# Altium PCB Motor Controller.PcbDoc (part 1 of 2)
Units mm, origin at the board's own origin, x right, y up, seen from the top; angles counter-clockwise.
Board outline 150 x 105 mm, 4 copper layers (Top Layer, Layer 1, Layer 2, Bottom Layer), stack 1.64 mm thick; 87 components, 29 nets, 264 pads, 470 vias.
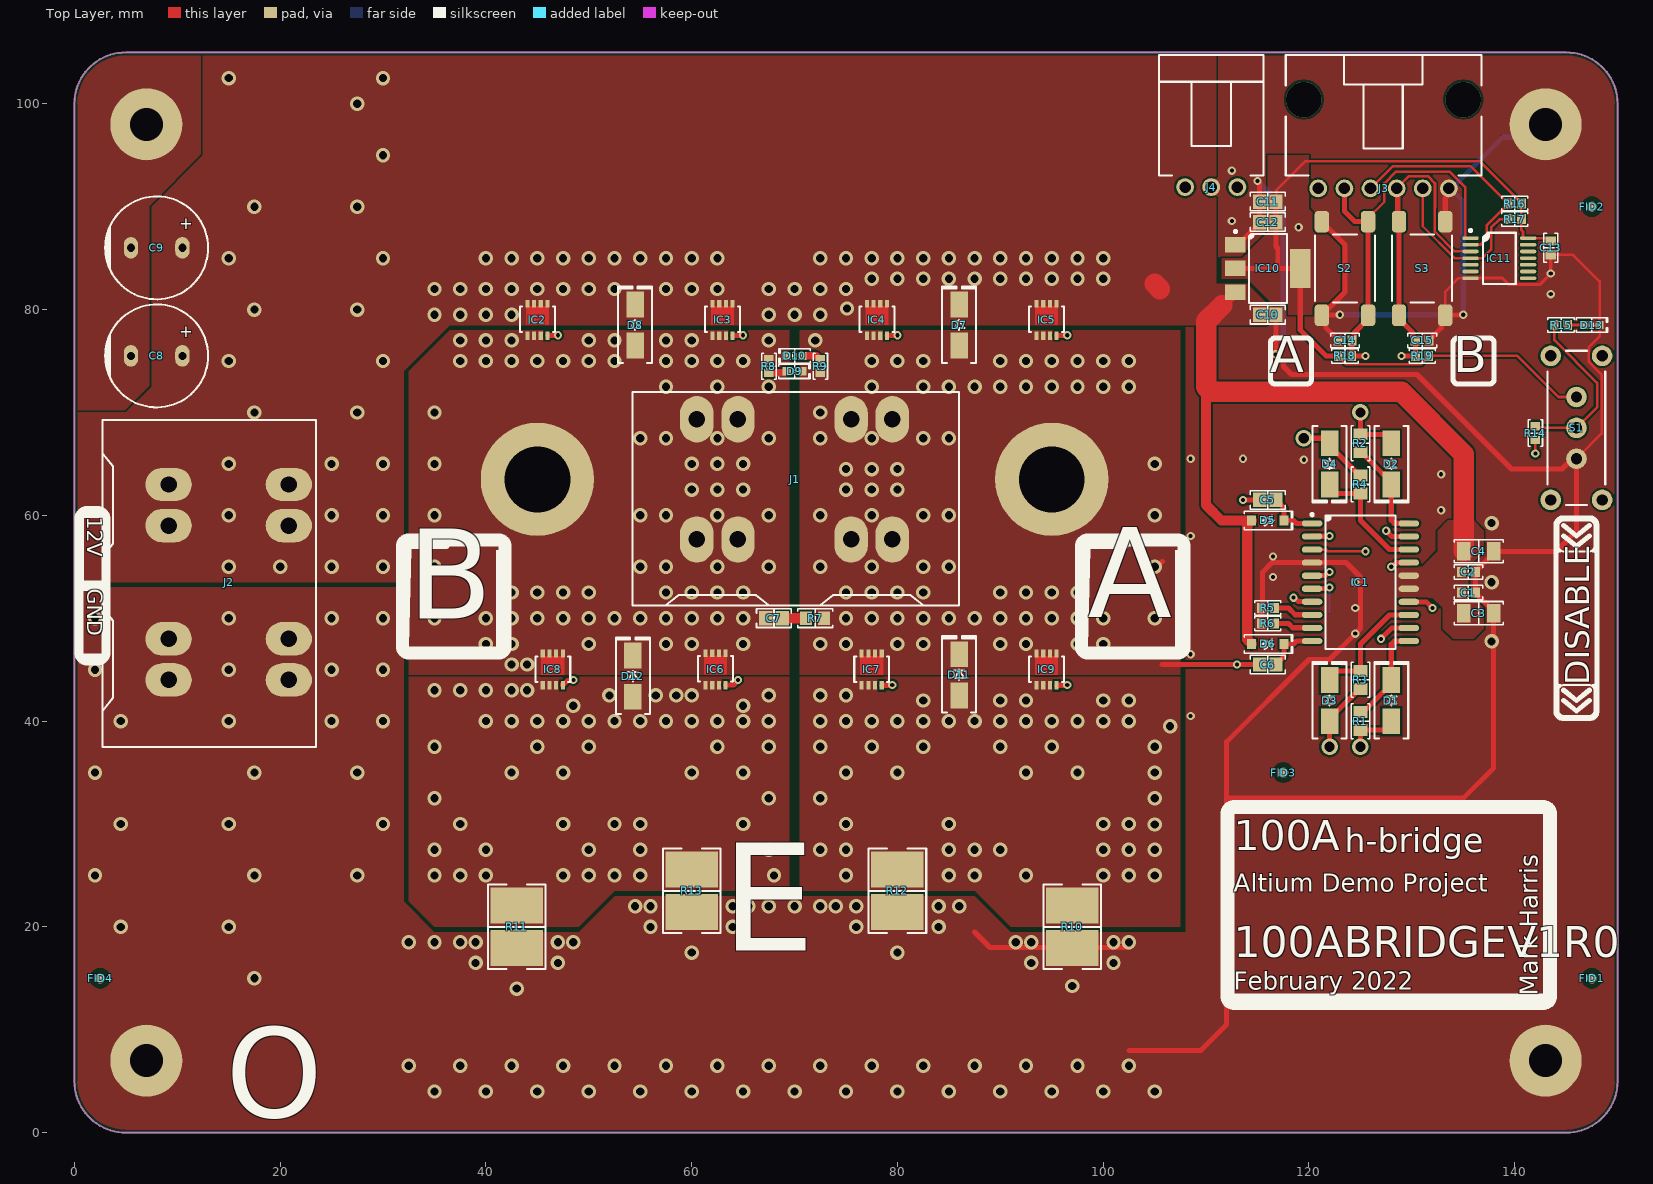
[diagram p0: Top Layer view]
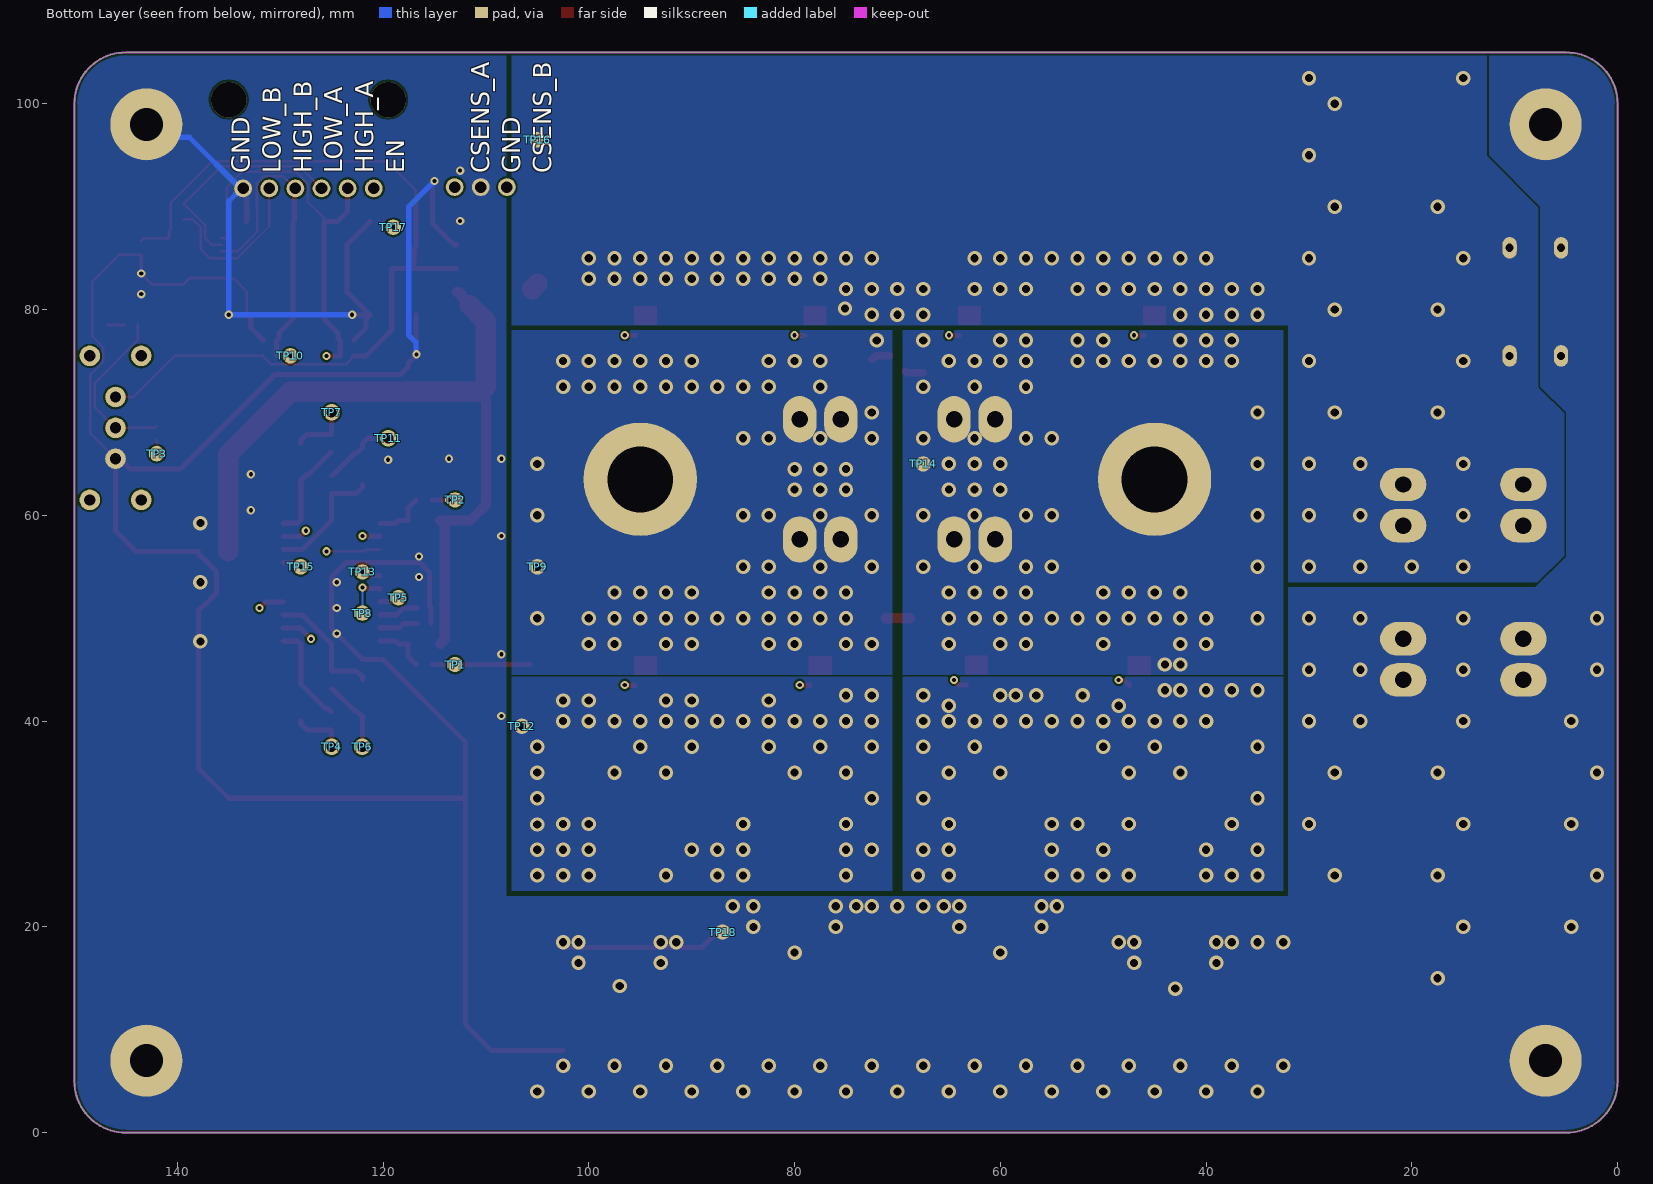
[diagram p1: Bottom Layer view, seen from below]
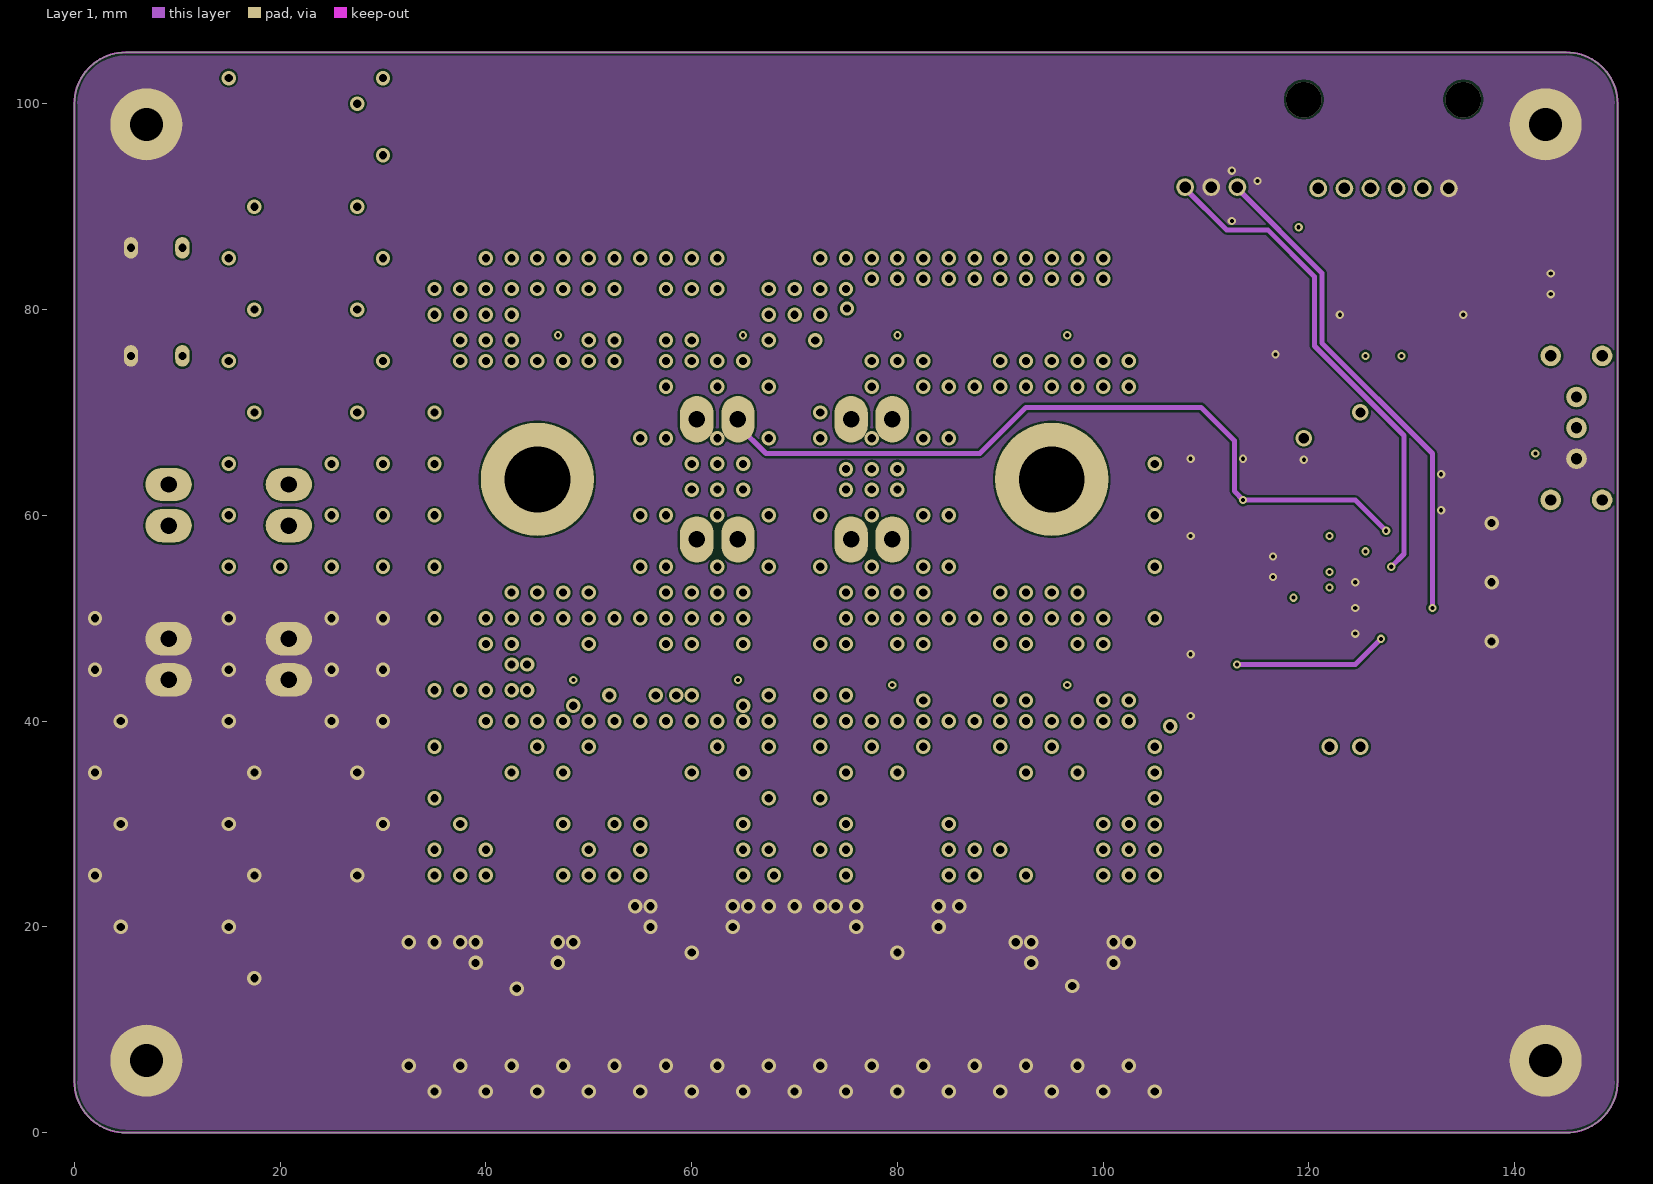
[diagram p2: Layer 1]
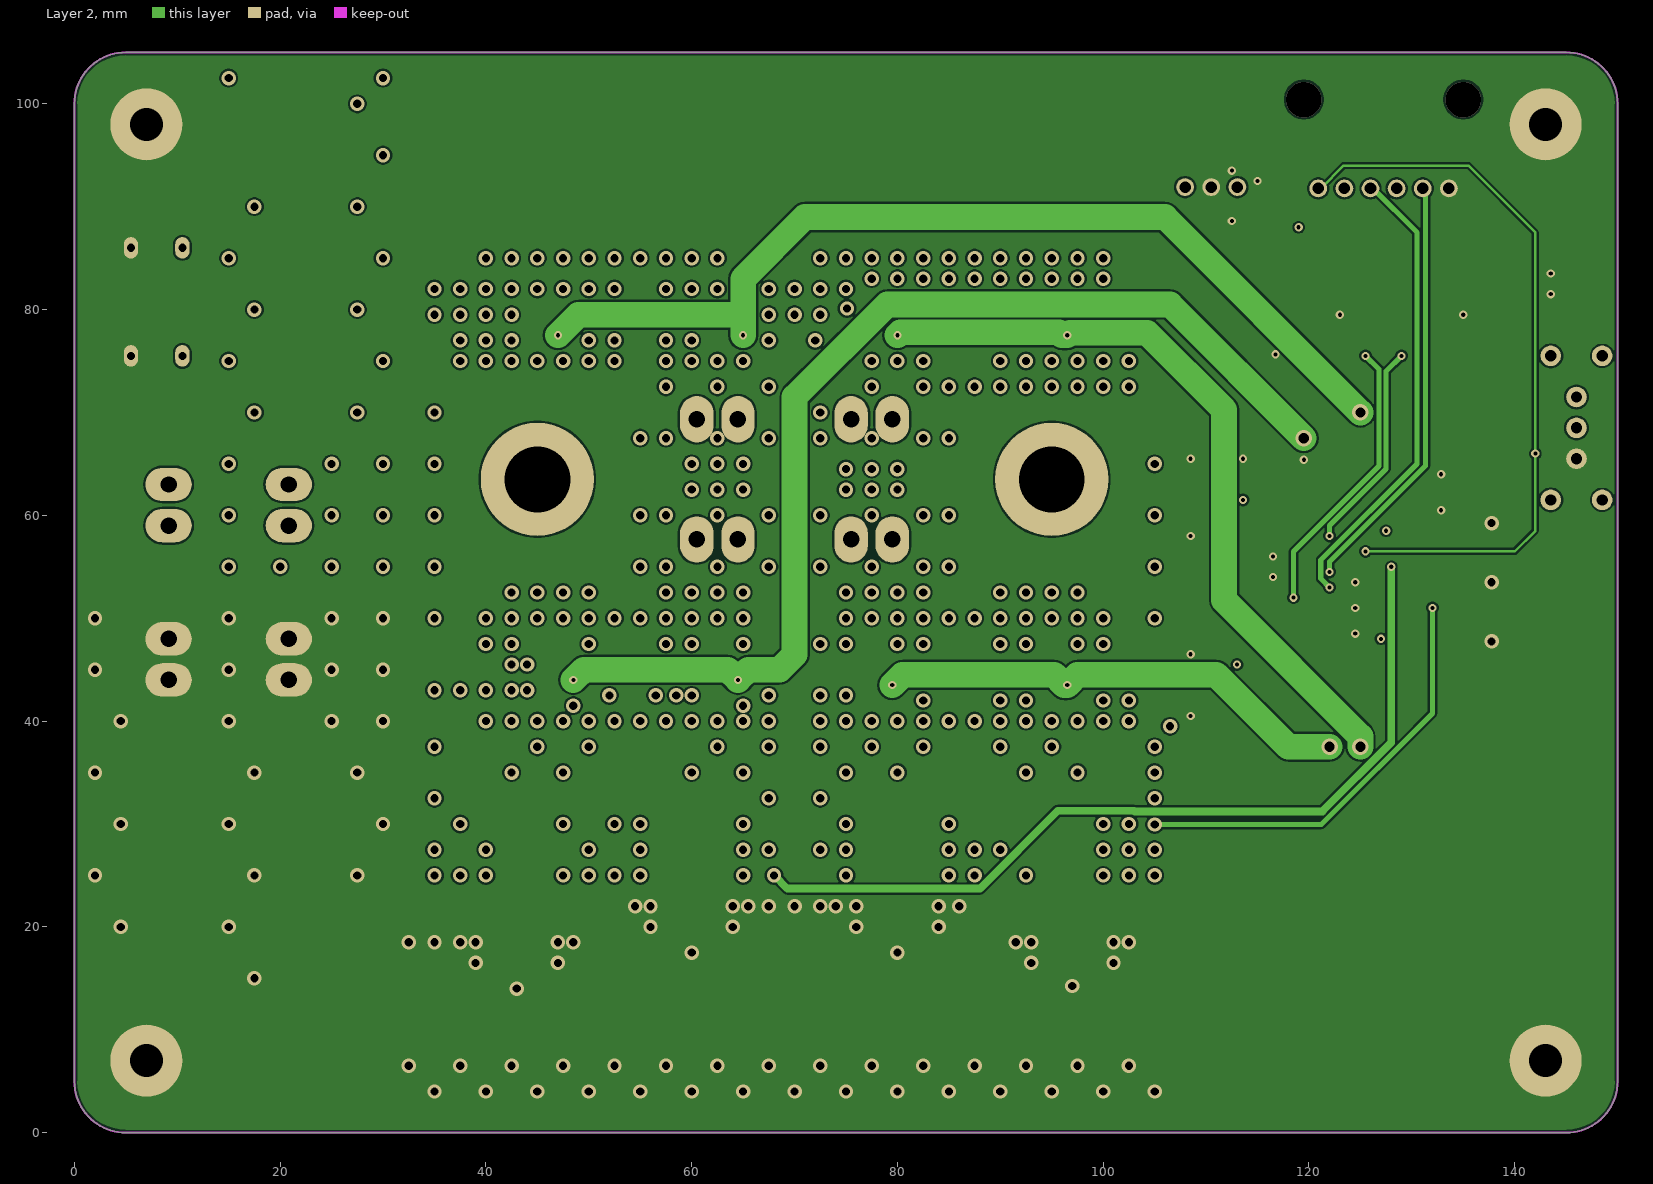
[diagram p3: Layer 2]
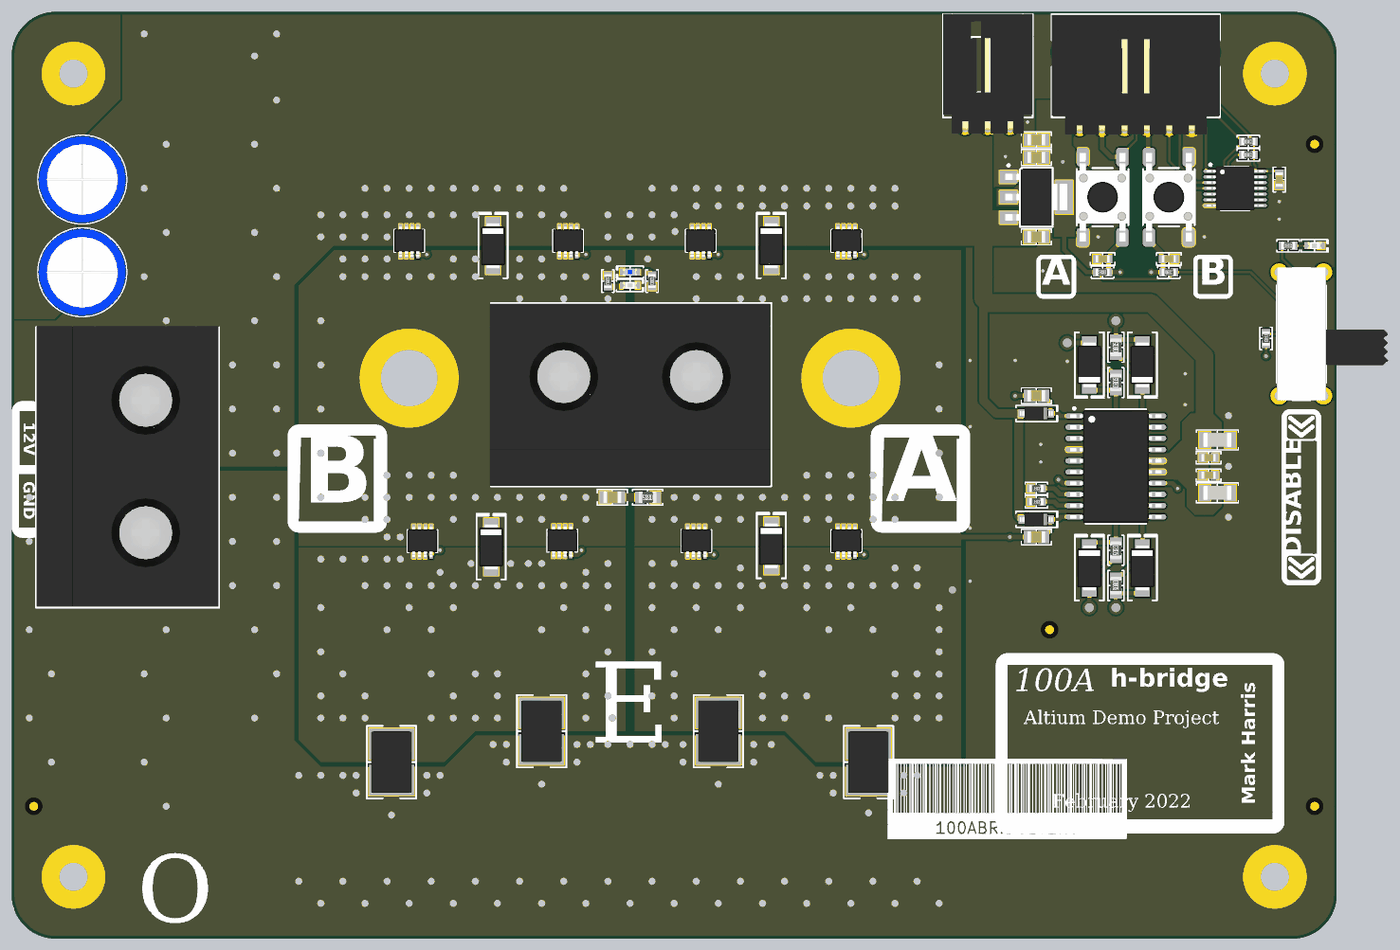
[diagram p4: 3D render of the assembled board from above, using the file's embedded part models]

## Layer stack, top to bottom
Top Solder: solder mask 0.0102, Solder Resist, Dk 3.5
Top Layer: signal copper 0.07
Dielectric 2: prepreg 0.2, PP-006, Dk 4.6
Layer 1: signal copper 0.0175
Dielectric 1: dielectric 1.065, FR-4, Dk 4.6
Layer 2: signal copper 0.0175
Dielectric 3: prepreg 0.2, PP-006, Dk 4.6
Bottom Layer: signal copper 0.07
Bottom Solder: solder mask 0.0102, Solder Resist, Dk 3.5

## Board outline
5,0 cw(c5,5) 0,5 0,100 cw(c5,100) 5,105 145,105 cw(c145,100) 150,100 150,5 cw(c145,5) 145,0

## Design rules (kind name [scope] priority, off if disabled: settings)
Clearance [All] p1: gap=0.2 ignorepadtopadclearanceinfootprint=FALSE
Height [All] p1: minheight=0 maxheight=40 prefheight=12.7
MinimumSolderMaskSliver [All] p1: minsoldermaskwidth=-10
PolygonConnect [All] p1: connectstyle=Direct reliefconductorwidth=0.254 reliefentries=4 polygonreliefangle="90 Angle" airgapwidth=0.254
RoutingVias [All] p1: holewidth=0.4 width=0.8 viastyle="Through Hole" minholewidth=0.4 minwidth=0.8 maxholewidth=3.5 maxwidth=7
SilkToSilkClearance [All] p1: silktosilkclearance=-10
SilkToSolderMaskClearance [IsPad] p1: minsilkscreentomaskgap=0.1 clearancetoexposedcopper=TRUE
SolderMaskExpansion "Via Tenting" [IsVia] p1: expansion=0.102 istentingtop=TRUE
SolderMaskExpansion [All] p2: expansion=0.102 istentingtop=FALSE
Width [All] p1: maxlimit=3 minlimit=0.2 preferedwidth=0.3
26 further rules are at their usual default settings.

## Classes and differential pairs
component class U_H-Bridge: C7 D7 D8 D9 D10 D11 D12 IC2 IC3 IC4 IC5 IC6 IC7 IC8 IC9 J1 J4 R7 R8 R9 R10 R11 R12 R13 TP1 TP2
component class "U_Gate Driver": C1 C2 C3 C4 C5 C6 D1 D2 D3 D4 D5 D6 IC1 R1 R2 R3 R4 R5 R6
component class U_Control: C13 C14 C15 D13 IC11 J3 R14 R15 R16 R17 R18 R19 S1 S2 S3
component class "Motor Driver": C8 C9 C10 C11 C12 FID1 FID2 FID3 FID4 IC10 J2 TP3 TP4 TP5 TP6 TP7 TP8 TP9 TP10 TP11 TP12 TP13 TP14 TP15 TP16 TP17 TP18

## Components (designator, comment, footprint, x,y, rotation, side; value= is the part's Value field where it differs from the comment)
C1 "0.1µF" "CAP 0603_1608" 135.5,52.5 r180 top
C2 "0.1µF" "CAP 0603_1608" 135.5,54.5 r180 top
C3 "10 µF" "CAP 1206_3216 - 0.8MM" 136.5,50.5 r180 top
C4 "10 µF" "CAP 1206_3216 - 0.8MM" 136.5,56.5 r180 top
C5 "1 µF" "CAP 0805_2012" 116,61.5 r0 top
C6 "1 µF" "CAP 0805_2012" 116,45.5 r0 top
C7 "0.22µF" "CAP 0805_2012" 68,50 r180 top
C8 "330 µF" "CAP TH ALPOLY D10.00mm S5.00mm H13.50mm" 8,75.5 r0 top
C9 "330 µF" "CAP TH ALPOLY D10.00mm S5.00mm H13.50mm" 8,86 r0 top
C10 "1 µF" "CAP 0805_2012" 116,79.5 r180 top
C11 "1 µF" "CAP 0805_2012" 116,90.5 r0 top
C12 "4.7 µF" "CAP 0805_2012" 116,88.5 r0 top
C13 "0.1 µF" "CAP 0603_1608" 143.5,86 r90 top
C14 "0.1 µF" "CAP 0603_1608" 123.5,77 r0 top
C15 "0.1 µF" "CAP 0603_1608" 131,77 r180 top
D1 "CDBA340L-G" "DO214AC SMA" 128,42 r90 top
D2 "CDBA340L-G" "DO214AC SMA" 128,65 r270 top
D3 "CDBA340L-G" "DO214AC SMA" 122,42 r90 top
D4 "CDBA340L-G" "DO214AC SMA" 122,65 r270 top
D5 "1N4148WTR" SOD-123 116,59.5 r0 top
D6 "1N4148WTR" SOD-123 116,47.5 r0 top
D7 "CDBA340L-G" "DO214AC SMA" 86,78.5 r90 top
D8 "CDBA340L-G" "DO214AC SMA" 54.5,78.5 r90 top
D9 "Green" "LED 0603_1608 GREEN" 70,74 r0 top
D10 "Blue" "LED 0603_1608 BLUE" 70,75.5 r180 top
D11 "CDBA340L-G" "DO214AC SMA" 86,44.5 r90 top
D12 "CDBA340L-G" "DO214AC SMA" 54.28,44.376 r90 top
D13 "Green" "LED 0603_1608 GREEN" 147.5,78.5 r0 top
FID1 "Fiducial" Fiducial-1mm 147.5,15 r90 top
FID2 "Fiducial" Fiducial-1mm 147.5,90 r90 top
FID3 "Fiducial" Fiducial-1mm 117.5,35 r90 top
FID4 "Fiducial" Fiducial-1mm 2.5,15 r90 top
IC1 "HIP4081AIBZ" "INTERSIL SOIC-20 WIDE" 125,53.5 r0 top
IC2 "PSMN1R5-25MLHX" "NEXPERIA LFPAK33 SOT1210" 45,79 r0 top
IC3 "PSMN1R5-25MLHX" "NEXPERIA LFPAK33 SOT1210" 63,79 r0 top
IC4 "PSMN1R5-25MLHX" "NEXPERIA LFPAK33 SOT1210" 78,79 r0 top
IC5 "PSMN1R5-25MLHX" "NEXPERIA LFPAK33 SOT1210" 94.5,79 r0 top
IC6 "PSMN1R5-25MLHX" "NEXPERIA LFPAK33 SOT1210" 62.325,45.035 r0 top
IC7 "PSMN1R5-25MLHX" "NEXPERIA LFPAK33 SOT1210" 77.5,45 r0 top
IC8 "PSMN1R5-25MLHX" "NEXPERIA LFPAK33 SOT1210" 46.5,45 r0 top
IC9 "PSMN1R5-25MLHX" "NEXPERIA LFPAK33 SOT1210" 94.5,45 r0 top
IC10 "LDL1117S33R" "ST SOT-223" 116,84 r0 top
IC11 "SN74LVC14APWR" "TI TSSOP-14 PW" 138.5,85 r0 top
J1 "0399200302" "MOLEX 0399200302" 70,63.5 r0 top
J2 "0399200302" "MOLEX 0399200302" 15,53.5 r270 top
J3 "0705550005" "MOLEX SDA-70555-6PIN" 127.25,98 r0 top
J4 "0705530002" "MOLEX SDA-70553-3PIN" 110.5,98.127 r0 top
R1 "20 Ohms" "RES 0805_2012" 125,40 r270 top
R2 "20 Ohms" "RES 0805_2012" 125,67 r90 top
R3 "20 Ohms" "RES 0805_2012" 125,44 r270 top
R4 "20 Ohms" "RES 0805_2012" 125,63 r90 top
R5 "75 kOhms" "RES 0603_1608" 116,51 r0 top
R6 "75 kOhms" "RES 0603_1608" 116,49.5 r0 top
R7 "10 kOhms" "RES 0805_2012" 72,50 r180 top
R8 "2.2 kOhms" "RES 0603_1608" 67.5,74.5 r90 top
R9 "2.2 kOhms" "RES 0603_1608" 72.5,74.5 r90 top
R10 "2 mOhms" "VISHAY WSHP2818" 97,20 r270 top
R11 "2 mOhms" "VISHAY WSHP2818" 43,20 r90 top
R12 "2 mOhms" "VISHAY WSHP2818" 80,23.5 r270 top
R13 "2 mOhms" "VISHAY WSHP2818" 60,23.5 r90 top
R14 "1 kOhms" "RES 0603_1608" 142,68 r270 top
R15 "120 Ohms" "RES 0603_1608" 144.5,78.5 r0 top
R16 "1 kOhms" "RES 0603_1608" 140,90.3 r0 top
R17 "1 kOhms" "RES 0603_1608" 140,88.8 r0 top
R18 "1 kOhms" "RES 0603_1608" 123.5,75.5 r180 top
R19 "1 kOhms" "RES 0603_1608" 131,75.5 r0 top
S1 "SK-12F17-G 7" "C&K SK-12F17-G 7" 146,68.5 r90 top
S2 "FSM6JSMAASTR" "TE FSM6JSMA" 123.5,84 r180 top
S3 "FSM6JSMAASTR" "TE FSM6JSMA" 131,84 r0 top
TP1 "Test Point" TestPoint-1.5mm 113,45.5 r270 bottom
TP2 "Test Point" TestPoint-1.5mm 113,61.5 r180 bottom
TP3 "Test Point" TestPoint-1.5mm 142,66 r180 bottom
TP4 "Test Point" TestPoint-1.5mm 125,37.5 r180 bottom
TP5 "Test Point" TestPoint-1.5mm 118.5,52 r180 bottom
TP6 "Test Point" TestPoint-1.5mm 122,37.5 r180 bottom
TP7 "Test Point" TestPoint-1.5mm 125,70 r180 bottom
TP8 "Test Point" TestPoint-1.5mm 122,50.5 r180 bottom
TP9 "Test Point" TestPoint-1.5mm 105,55 r180 bottom
TP10 "Test Point" TestPoint-1.5mm 129,75.5 r180 bottom
TP11 "Test Point" TestPoint-1.5mm 119.5,67.5 r180 bottom
TP12 "Test Point" TestPoint-1.5mm 106.5,39.5 r180 bottom
TP13 "Test Point" TestPoint-1.5mm 122,54.5 r180 bottom
TP14 "Test Point" TestPoint-1.5mm 67.5,65 r180 bottom
TP15 "Test Point" TestPoint-1.5mm 128,55 r180 bottom
TP16 "Test Point" TestPoint-1.5mm 105,96.5 r180 bottom
TP17 "Test Point" TestPoint-1.5mm 119,88 r180 bottom
TP18 "Test Point" TestPoint-1.5mm 87,19.5 r180 bottom

## Footprints (in the part's own frame and the unit in brackets; to place one, negate y for a bottom-side part, rotate by r counter-clockwise, add the part's x,y. Pads: shape width x height; smd on the part's side, far side on the other; paste and mask are expansions set on the pad)
"C&K SK-12F17-G 7" [mm] "SWITCH SLIDE SPDT 300MA 30V"
  round 2 hole 1.1: 1(-3,0) 2(0,0) 3(3,0) M(-7,-2.5) M(-7,2.5) M(7,-2.5) M(7,2.5)
  silkscreen extent -7.5,-2.8 7.5,2.8, body extent -7.5,-9.8 7.5,2.8, height 8
"CAP 0603_1608" [mm] "Chip Capacitor, 2-Leads, Body 1.60x0.80mm, IPC Medium Density"
  rect 0.9x1 smd: 1(-0.675,0) 2(0.675,0)
  silkscreen extent -1.4,-0.7 1.4,0.7, body extent -0.8,-0.41 0.8,0.41, height 0.82
"CAP 0805_2012" [mm] "Chip Capacitor, 2-Leads, Body 2.00x1.20mm, IPC Medium Density"
  rect 1.3x1.4 smd: 1(-0.8,0) 2(0.8,0)
  silkscreen extent -1.7,-0.9 1.7,0.9, body extent -1,-0.64 1,0.64, height 1.26
"CAP 1206_3216 - 0.8MM" [mm] "Chip Capacitor, 2-Leads, Body 3.25x1.60mm, IPC Medium Density"
  rect 1.3x1.8 smd: 1(-1.45,0) 2(1.45,0)
  silkscreen extent -2.37,-1.12 2.37,1.12, body extent -1.6,-0.8 1.6,0.8, height 0.8
"CAP TH ALPOLY D10.00mm S5.00mm H13.50mm" [mm] "10.00mm Diameter 13.50mm Lead Spacing Aluminum - Polymer Capacitors Radial, Can"
  oval 1.4x2.1 hole 0.8: 1(2.5,0) 2(-2.5,0)
  silkscreen extent -5,-5 5,5, body extent -5.01,-5 5,5, height 13.5
"DO214AC SMA" [mm] "Molded Diode, 2-Leads, Body 4.30x2.60mm, IPC Medium Density"
  rect 2.5x1.7 smd: 1(-2,0) 2(2,0)
  silkscreen extent -3.68,-1.65 3.75,1.65, body extent -2.6,-1.37 2.6,1.37, height 2.4
Fiducial-1mm [mm]
  round 1 smd paste-1 mask+0.5: F(0,0)
  Top Layer pour cut-out: -1,0 -0.924,0.383 -0.707,0.707 -0.383,0.924 0,1 0,1 0.383,0.924 0.707,0.707 0.924,0.383 1,0 1,0 0.924,-0.383 0.707,-0.707 0.383,-0.924 0,-1 0,-1 -0.383,-0.924 -0.707,-0.707 -0.924,-0.383 -1,0
"INTERSIL SOIC-20 WIDE" [mm] "SOIC, 20-Leads, Body 12.80x7.50mm, Pitch 1.27mm, IPC Medium Density"
  oval 2x0.6 smd: 1(-4.7,5.715) 2(-4.7,4.445) 3(-4.7,3.175) 4(-4.7,1.905) 5(-4.7,0.635) 6(-4.7,-0.635) 7(-4.7,-1.905) 8(-4.7,-3.175) 9(-4.7,-4.445) 10(-4.7,-5.715) 11(4.7,-5.715) 12(4.7,-4.445) 13(4.7,-3.175) 14(4.7,-1.905) 15(4.7,-0.635) 16(4.7,0.635) 17(4.7,1.905) 18(4.7,3.175) 19(4.7,4.445) 20(4.7,5.715)
  silkscreen extent -4.82,-6.5 3.4,6.69, body extent -5.16,-6.4 5.16,6.4, height 2.65
"LED 0603_1608 BLUE" [mm] "Chip Diode, 2-Leads, Body 1.60x0.80mm, IPC Medium Density"
  rect 0.8x0.8 smd: 1(-0.75,0) 2(0.75,0)
  silkscreen extent -1.52,-0.7 1.52,0.7, body extent -0.8,-0.4 0.8,0.4, height 0.53
"LED 0603_1608 GREEN" [mm] "Chip Diode, 2-Leads, Body 1.60x0.80mm, IPC Medium Density"
  rect 0.8x0.8 smd: 1(-0.75,0) 2(0.75,0)
  silkscreen extent -1.52,-0.7 1.52,0.7, body extent -0.8,-0.4 0.8,0.4, height 0.53
"MOLEX 0399200302" [mm]
  oval 3.25x4.5 hole 1.6: 1(-9.5,-5.84) 1(-9.5,5.84) 1(-5.5,-5.84) 1(-5.5,5.84) 2(5.5,-5.84) 2(5.5,5.84) 2(9.5,-5.84) 2(9.5,5.84)
  silkscreen extent -15.75,-12.25 16,8.5, body extent -15.88,-12.19 15.88,8.43, height 35.05
"MOLEX SDA-70553-3PIN" [mm] "SL Right Angle Header W/LAtch & Trip-Pegs 2.54mm Centres"
  round 1.73 hole 1.13: 1(-2.54,-6.223) 2(0,-6.223) 3(2.54,-6.223)
  silkscreen extent -5.08,-5.08 5.08,6.6, body extent -5.08,-6.92 5.08,6.67, height 6.98
"MOLEX SDA-70555-6PIN" [mm] "SL Right Angle Header W/LAtch & Trip-Pegs 2.54mm Centres"
  round 1.73 hole 1.13: 1(-6.35,-6.223) 2(-3.81,-6.223) 3(-1.27,-6.223) 4(1.27,-6.223) 5(3.81,-6.223) 6(6.35,-6.223)
  silkscreen extent -9.51,-4.95 9.51,6.73, body extent -9.53,-6.92 9.52,6.67, height 6.98
"NEXPERIA LFPAK33 SOT1210" [mm]
  rect 0.4x0.75 smd: D(-0.975,1.575) D(-0.325,1.575) D(0.325,1.575) D(0.975,1.575)
  rect 0.4x0.83 smd: G(0.975,-1.535) S(-0.975,-1.535) S(-0.325,-1.535) S(0.325,-1.535)
  Top Layer region: -1.125,-0.52 1.125,-0.52 1.125,1.33 -1.125,1.33
  silkscreen extent -1.7,-1.2 1.7,1.3, body extent -1.7,-1.75 1.7,1.65, height 0.9
"RES 0603_1608" [mm] "Chip Resistor, 2-Leads, Body 1.60x0.80mm, IPC Medium Density"
  rect 0.85x0.95 smd: 1(-0.65,0) 2(0.65,0)
  silkscreen extent -1.27,-0.7 1.27,0.7, body extent -0.8,-0.4 0.8,0.4, height 0.45
"RES 0805_2012" [mm] "Chip Resistor, 2-Leads, Body 2.00x1.25mm, IPC Medium Density"
  rect 1.15x1.35 smd: 1(-0.875,0) 2(0.875,0)
  silkscreen extent -1.7,-0.9 1.7,0.9, body extent -1,-0.62 1,0.63, height 0.6
SOD-123 [mm] "SOD, 2-Leads, Body 1.55x3.70mm, IPC Medium Density"
  rect 0.9x0.95 smd: 1(-1.575,0) 2(1.575,0)
  silkscreen extent -2.3,-0.92 2.41,0.92, body extent -1.86,-0.78 1.86,0.77, height 1.35
"ST SOT-223" [mm] "SOT223, 4-Leads, Body 6.50x7.00mm (avg), Pitch 2.30mm, IPC Medium Density"
  rect 2x1.5 smd: 1(-3.15,2.3) 2(-3.15,0) 3(-3.15,-2.3)
  rect 2x3.8 smd: 4(3.15,0)
  silkscreen extent -3.27,-3.35 1.85,3.72, body extent -3.52,-3.25 3.5,3.25, height 1.8
"TE FSM6JSMA" [mm]
  rrect50% 1.4x2.1 smd: 1(2.25,4.55) 2(2.25,-4.55) 3(-2.25,4.55) 4(-2.25,-4.55)
  silkscreen extent -2.92,-3.3 2.92,3.3, body extent -3,-5 3,5, height 7.11
TestPoint-1.5mm [mm]
  round 1.5 smd: 1(0,0)
"TI TSSOP-14 PW" [mm] "TSSOP, 14-Leads, Body 5.00x4.40mm, Pitch 0.65mm, IPC Medium Density"
  oval 1.6x0.35 smd: 1(-2.8,1.95) 2(-2.8,1.3) 3(-2.8,0.65) 4(-2.8,0) 5(-2.8,-0.65) 6(-2.8,-1.3) 7(-2.8,-1.95) 8(2.8,-1.95) 9(2.8,-1.3) 10(2.8,-0.65) 11(2.8,0) 12(2.8,0.65) 13(2.8,1.3) 14(2.8,1.95)
  silkscreen extent -2.92,-2.5 1.6,2.8, body extent -3.21,-2.5 3.21,2.5, height 1.2
"VISHAY WSHP2818" [mm] "Chip Resistor, 2-Leads, Body 7.10x4.60mm, IPC Medium Density"
  rect 3.5x5.1 smd: 1(-2.055,0) 2(2.055,0)
  silkscreen extent -4.1,-2.8 4.1,2.8, body extent -3.55,-2.3 3.55,2.3, height 1.5

## Part data
C1 C2: library part 06035C104MAT2A, "CAP CER 0.1UF 50V X7R 0603", Device Package="0603 (1608 Metric)", manufacturer="AVX Corporation", Operating Temperature="-55°C ~ 125°C", Supplier Part Number 1=478-7928-1-ND, Temperature Coefficient=X7R, Tolerance=±20%, Voltage - Rated=50V, Applications="General Purpose", Capacitance=0.1µF, componentlink1description=Datasheet, componentlink1url=http://datasheets.avx.com/X7RDielectric.pdf, componentlink2description="DigiKey Link", componentlink2url=http://digikey.com/product-detail/en/avx-corporation/06035C104MAT2A/478-7928-1-ND/3881551, lastupdated="02/09/2020 01:03:35", Lifecycle Status=Active, Minimum Order=1, Mounting Type="Surface Mount, MLCC", Package / Case="0603 (1608 Metric)", packaging=TapeAndReel, Part Number=06035C104MAT2A, Part Status=Active, partid=2734, price=0.02, series=-, Size / Dimension="0.063\" L x 0.032\" W (1.60mm x 0.81mm)", Supplier 1=DigiKey, Thickness (Max)="0.035\" (0.90mm)"
C3 C4: library part GRT31CR61H106ME01L, "CAP CER 10UF 50V X5R 1206", Device Package="1206 (3216 Metric)", manufacturer="Murata Electronics", Operating Temperature="-55°C ~ 85°C", Ratings=AEC-Q200, Supplier Part Number 1=490-12457-1-ND, Temperature Coefficient=X5R, Tolerance=±20%, Voltage - Rated=50V, Applications=Automotive, Capacitance="10 µF", componentlink1description=Datasheet, componentlink1url=https://search.murata.co.jp/Ceramy/image/img/A01X/G101/ENG/GRT31CR61H106ME01-01.pdf, componentlink2description="DigiKey Link", componentlink2url=https://www.digikey.com/en/products/detail/murata-electronics/GRT31CR61H106ME01L/5416879, lastupdated="04/03/2022 17:33:28", Lifecycle Status=Active, Minimum Order=1, Mounting Type="Surface Mount, MLCC", Package / Case="1206 (3216 Metric)", packaging=TapeAndReel, Part Number=GRT31CR61H106ME01L, Part Status=Active, partid=22693, price=0.09, series=GRT, Size / Dimension="0.126\" L x 0.063\" W (3.20mm x 1.60mm)", Supplier 1=DigiKey, Thickness (Max)="0.071\" (1.80mm)"
C5 C6 C10 C11: library part 08055C105KAZ2A, "CAP CER 1UF 50V X7R 0805", Device Package="0805 (2012 Metric)", manufacturer="KYOCERA AVX", Operating Temperature="-55°C ~ 125°C", Supplier Part Number 1=478-08055C105KAZ2ACT-ND, Temperature Coefficient=X7R, Tolerance=±10%, Voltage - Rated=50V, Applications="Boardflex Sensitive", Capacitance="1 µF", componentlink1description=Datasheet, componentlink1url=https://datasheets.kyocera-avx.com/FlexitermMLCC.pdf, componentlink2description="DigiKey Link", componentlink2url=https://www.digikey.com/en/products/detail/kyocera-avx/08055C105KAZ2A/11568641, Features="Soft Termination", lastupdated="05/03/2022 16:50:45", Lifecycle Status=Active, Minimum Order=1, Mounting Type="Surface Mount, MLCC", Package / Case="0805 (2012 Metric)", packaging=TapeAndReel, Part Number=08055C105KAZ2A, Part Status=Active, partid=33480, price=0.06, series=-, Size / Dimension="0.079\" L x 0.049\" W (2.01mm x 1.25mm)", Supplier 1=DigiKey, Thickness (Max)="0.055\" (1.40mm)"
C7: library part 08055C224KAZ2A, "CAP CER 0.22UF 50V X7R 0805", Device Package="0805 (2012 Metric)", manufacturer="AVX Corporation", Operating Temperature="-55°C ~ 125°C", Supplier Part Number 1=478-3555-1-ND, Temperature Coefficient=X7R, Tolerance=±10%, Voltage - Rated=50V, Applications="Boardflex Sensitive", Capacitance=0.22µF, componentlink1description=Datasheet, componentlink1url=http://datasheets.avx.com/FlexitermMLCC.pdf, componentlink2description="DigiKey Link", componentlink2url=http://digikey.com/product-detail/en/avx-corporation/08055C224KAZ2A/478-3555-1-ND/1024908, Features="Soft Termination", lastupdated="02/09/2020 01:04:11", Lifecycle Status=Active, Minimum Order=1, Mounting Type="Surface Mount, MLCC", Package / Case="0805 (2012 Metric)", packaging=TapeAndReel, Part Number=08055C224KAZ2A, Part Status=Active, partid=16770, price=0.07, series=FLEXITERM®, Size / Dimension="0.079\" L x 0.049\" W (2.01mm x 1.25mm)", Supplier 1=DigiKey, Thickness (Max)="0.055\" (1.40mm)"
C8 C9: library part 337AVG035MGBJ, "CAP ALUM POLY 330UF 20% 35V T/H", Device Package="Radial, Can", ESR (Equivalent Series Resistance)=24mOhm, Lifetime @ Temp.="1500 Hrs @ 125°C", manufacturer="Illinois Capacitor", Operating Temperature="-55°C ~ 125°C", Ripple Current @ High Frequency="3.4 A @ 100 kHz", Ripple Current @ Low Frequency="170 mA @ 120 Hz", Supplier Part Number 1=1572-1435-ND, Tolerance=±20%, Voltage - Rated="35 V", Applications="General Purpose", Capacitance="330 µF", componentlink1description=Datasheet, componentlink1url=http://www.illinoiscapacitor.com/pdf/seriesDocuments/AVG%20series.pdf, componentlink2description="DigiKey Link", componentlink2url=https://www.digikey.com/en/products/detail/illinois-capacitor/337AVG035MGBJ/5412303, Height - Seated (Max)="0.532\" (13.50mm)", lastupdated="05/03/2022 17:42:14", Lead Spacing="0.197\" (5.00mm)", Lifecycle Status=Active, Minimum Order=1, Mounting Type="Through Hole", Package / Case="Radial, Can", packaging=Bulk, Part Number=337AVG035MGBJ, Part Status=Active, partid=4548, price=1.51, series=AVG, Size / Dimension="0.394\" Dia (10.00mm)", Supplier 1=DigiKey, Type=Polymer
C12: library part 885012107009, "CAP CER 4.7UF 10V X5R 0805", Device Package="0805 (2012 Metric)", manufacturer="Würth Elektronik", Operating Temperature="-55°C ~ 85°C", Supplier Part Number 1=732-7619-1-ND, Temperature Coefficient=X5R, Tolerance=±20%, Voltage - Rated=10V, Applications="General Purpose", Capacitance="4.7 µF", componentlink1description=Datasheet, componentlink1url=https://katalog.we-online.de/pbs/datasheet/885012107009.pdf, componentlink2description="DigiKey Link", componentlink2url=https://www.digikey.com/en/products/detail/würth-elektronik/885012107009/5453474, lastupdated="05/03/2022 16:51:07", Lifecycle Status=Active, Minimum Order=1, Mounting Type="Surface Mount, MLCC", Package / Case="0805 (2012 Metric)", packaging=TapeAndReel, Part Number=885012107009, Part Status=Active, partid=14493, price=0.09, series=WCAP-CSGP, Size / Dimension="0.079\" L x 0.049\" W (2.00mm x 1.25mm)", Supplier 1=DigiKey, Thickness (Max)="0.053\" (1.35mm)"
C13 C14 C15: library part C0603C104K8RAC7867, "CAP CER 0.1UF 10V X7R 0603", Device Package="0603 (1608 Metric)", manufacturer=KEMET, Operating Temperature="-55°C ~ 125°C", Supplier Part Number 1=399-C0603C104K8RAC7867CT-ND, Temperature Coefficient=X7R, Tolerance=±10%, Voltage - Rated=10V, Applications="Bypass, Decoupling", Capacitance="0.1 µF", componentlink1description=Datasheet, componentlink1url=https://api.kemet.com/component-edge/download/datasheet/C0603C104K8RACTU.pdf, componentlink2description="DigiKey Link", componentlink2url=https://www.digikey.com/en/products/detail/kemet/C0603C104K8RAC7867/411094, lastupdated="05/03/2022 16:47:38", Lifecycle Status=Active, Minimum Order=1, Mounting Type="Surface Mount, MLCC", Package / Case="0603 (1608 Metric)", packaging=TapeAndReel, Part Number=C0603C104K8RAC7867, Part Status=Active, partid=35650, price=0.01, series="SMD Comm X7R", Size / Dimension="0.063\" L x 0.031\" W (1.60mm x 0.80mm)", Supplier 1=DigiKey, Thickness (Max)="0.034\" (0.87mm)"
D1 D2 D3 D4 D7 D8 D11 D12: "DIODE SCHOTTKY 40V 3A DO214AC", Current - Average Rectified (Io)=3A, Current - Reverse Leakage @ Vr="1.5 mA @ 40 V", manufacturer="Comchip Technology", Operating Temperature - Junction="125°C (Max)", Package / Case="DO-214AC, SMA", Supplier Device Package="DO-214AC (SMA)", Supplier Part Number 1=641-1258-1-ND, Voltage - DC Reverse (Vr) (Max)="40 V", Voltage - Forward (Vf) (Max) @ If="400 mV @ 3 A", componentlink1description=Datasheet, componentlink1url=http://www.comchiptech.com/admin/files/product/CDBA340L-HF%20RevC514368.pdf, componentlink2description="DigiKey Link", componentlink2url=https://www.digikey.com/en/products/detail/comchip-technology/CDBA340L-G/1249117, Diode Type=Schottky, lastupdated="04/03/2022 18:07:12", Lifecycle Status=Active, Minimum Order=1, Mounting Type="Surface Mount", packaging=TapeAndReel, Part Number=CDBA340L-G, Part Status=Active, partid=2091, price=0.20, series=-, Speed="Fast Recovery =< 500ns, > 200mA (Io)", Supplier 1=DigiKey
D5 D6: "DIODE GEN PURP 75V 250MA SOD123", Capacitance @ Vr, F="4pF @ 0V, 1MHz", Current - Average Rectified (Io)="250mA (DC)", Current - Reverse Leakage @ Vr="2.5 µA @ 75 V", manufacturer="SMC Diode Solutions", Operating Temperature - Junction="-55°C ~ 150°C", Package / Case=SOD-123, Supplier Part Number 1=1655-1360-1-ND, Voltage - DC Reverse (Vr) (Max)="75 V", Voltage - Forward (Vf) (Max) @ If="1.25 V @ 150 mA", componentlink1description=Datasheet, componentlink1url=http://www.smc-diodes.com/propdf/1N4148W%20N0571%20REV.D.pdf, componentlink2description="DigiKey Link", componentlink2url=https://www.digikey.com/en/products/detail/smc-diode-solutions/1N4148WTR/6022450, Diode Type=Standard, lastupdated="04/03/2022 18:07:21", Lifecycle Status=Active, Minimum Order=1, Mounting Type="Surface Mount", packaging=TapeAndReel, Part Number=1N4148WTR, Part Status=Active, partid=1049, price=0.02, Reverse Recovery Time (trr)="4 ns", series=-, Speed="Fast Recovery =< 500ns, > 200mA (Io)", Supplier 1=DigiKey, Supplier Device Package=SOD-123
D9 D13: library part XZMG53W-1, "LED GREEN CLEAR CHIP SMD", Current - Test=20mA, Device Package="0603 (1608 Metric)", Lens Color=Colorless, manufacturer=SunLED, Millicandela Rating=11mcd, Supplier Device Package="Chip LED", Supplier Part Number 1=1497-1186-1-ND, Voltage - Forward (Vf) (Typ)=2.2V, Color=Green, componentlink1description=Datasheet, componentlink1url=https://www.sunledusa.com/products/spec/XZMG53W-1.pdf, componentlink2description="DigiKey Link", componentlink2url=https://www.digikey.com/en/products/detail/sunled/XZMG53W-1/4745960, Configuration=Standard, Height (Max)=0.75mm, lastupdated="04/03/2022 18:10:12", Lens Size="1.10mm x 0.80mm", Lens Style="Rectangle with Flat Top", Lens Transparency=Clear, Lifecycle Status=Active, Minimum Order=1, Mounting Type="Surface Mount", Package / Case="0603 (1608 Metric)", packaging=TapeAndReel, Part Number=XZMG53W-1, Part Status=Active, partid=678, price=0.04, series=-, Size / Dimension="1.60mm L x 0.80mm W", Supplier 1=DigiKey, Viewing Angle=120°, Wavelength - Dominant=568nm, Wavelength - Peak=565nm
D10: library part 19-213SUBC/S400-A5/S208-2/TR8, "LED BLUE CLEAR 2SMD", Current - Test=5mA, Device Package="0603 (1608 Metric)", Lens Color=Colorless, manufacturer="Everlight Electronics Co Ltd", Supplier Device Package=2-SMD, Supplier Part Number 1=1080-1581-1-ND, Voltage - Forward (Vf) (Typ)=2.9V, Color=Blue, componentlink1description=Datasheet, componentlink1url=//media.digikey.com/pdf/Data%20Sheets/Everlight%20PDFs/19-213SUBC-S400-A5-S208-2-TR8.pdf, componentlink2description="DigiKey Link", componentlink2url=https://www.digikey.com/en/products/detail/everlight-electronics-co-ltd/19-213SUBC-S400-A5-S208-2-TR8/8535275, Configuration=Standard, Height (Max)=0.70mm, lastupdated="04/03/2022 18:09:56", Lens Size="1.20mm x 0.80mm", Lens Style="Rectangle with Flat Top", Lens Transparency=Clear, Lifecycle Status=Active, Minimum Order=1, Mounting Type="Surface Mount", Package / Case="0603 (1608 Metric)", packaging=TapeAndReel, Part Number=19-213SUBC/S400-A5/S208-2/TR8, Part Status=Active, partid=808, price=0.04, series=-, Size / Dimension="1.60mm L x 0.80mm W", Supplier 1=DigiKey, Viewing Angle=120°, Wavelength - Peak=468nm
IC1: "IC GATE DRVR HALF-BRIDGE 20SOIC", Current - Peak Output (Source, Sink)="2.6A, 2.4A", Device Package="20-SOIC (0.295\", 7.50mm Width)", High Side Voltage - Max (Bootstrap)=95V, Logic Voltage - VIL, VIH="1V, 2.5V", manufacturer="Renesas Electronics America Inc.", Operating Temperature="-40°C ~ 125°C (TJ)", Supplier Device Package=20-SOIC, Supplier Part Number 1=HIP4081AIBZ-ND, Voltage - Supply="9.5V ~ 15V", Channel Type=Independent, componentlink1description=Datasheet, componentlink1url=https://www.renesas.com/en-us/www/doc/datasheet/hip4081a.pdf, componentlink2description="DigiKey Link", componentlink2url=//digikey.com/product-detail/en/renesas-electronics-america-inc/HIP4081AIBZ/HIP4081AIBZ-ND/821444, Driven Configuration=Half-Bridge, Gate Type="N-Channel MOSFET", Input Type=Non-Inverting, lastupdated="12/12/2019 08:03:43", Lifecycle Status=0, Minimum Order=1, Mounting Type="Surface Mount", Number of Drivers=4, Package / Case="20-SOIC (0.295\", 7.50mm Width)", packaging=Tube, Part Number=HIP4081AIBZ, Part Status=Active, partid=4, price=5.41, Rise / Fall Time (Typ)="10ns, 10ns", series=-, Supplier 1=DigiKey
IC2 IC3 IC4 IC5 IC6 IC7 IC8 IC9: "MOSFET N-CH 25V 150A LFPAK33", Current - Continuous Drain (Id) @ 25°C="150A (Ta)", Device Package="1210 (3225 Metric)", Drain to Source Voltage (Vdss)="25 V", Drive Voltage (Max Rds On,  Min Rds On)="4.5V, 10V", Input Capacitance (Ciss) (Max) @ Vds="3167 pF @ 12 V", manufacturer="Nexperia USA Inc.", Operating Temperature="-55°C ~ 175°C (TJ)", Power Dissipation (Max)="106W (Ta)", Supplier Device Package=LFPAK33, Supplier Part Number 1=1727-PSMN1R5-25MLHXCT-ND, componentlink1description=Datasheet, componentlink1url=https://assets.nexperia.com/documents/data-sheet/PSMN1R5-25MLH.pdf, componentlink2description="DigiKey Link", componentlink2url=https://www.digikey.com/en/products/detail/nexperia-usa-inc/PSMN1R5-25MLHX/11205917, FET Type=N-Channel, Gate Charge (Qg) (Max) @ Vgs="58 nC @ 10 V", lastupdated="05/03/2022 14:14:29", Lifecycle Status=Active, Minimum Order=1, Mounting Type="Surface Mount", Package / Case="1210 (3225 Metric)", packaging=TapeAndReel, Part Number=PSMN1R5-25MLHX, Part Status=Active, price=0.82, Rds On (Max) @ Id, Vgs="1.81mOhm @ 25A, 10V", series=-, Supplier 1=DigiKey, Technology="MOSFET (Metal Oxide)", Vgs (Max)=±20V, Vgs(th) (Max) @ Id="2.2V @ 1mA"
IC10: "IC REG LINEAR 3.3V 1.2A SOT223", Current - Output=1.2A, Current - Quiescent (Iq)="500 µA", manufacturer=STMicroelectronics, Operating Temperature="-40°C ~ 125°C (TJ)", Package / Case="TO-261-4, TO-261AA", Supplier Device Package=SOT-223, Supplier Part Number 1=497-17239-1-ND, Voltage - Input (Max)=18V, Voltage - Output (Min/Fixed)=3.3V, Voltage Dropout (Max)="0.6V @ 1.2A", componentlink1description=Datasheet, componentlink1url=http://www.st.com/content/ccc/resource/technical/document/datasheet/group3/0e/5a/00/ca/10/1a/4f/a5/DM00366442/files/DM00366442.pdf/jcr:content/translations/en.DM00366442.pdf, componentlink2description="DigiKey Link", componentlink2url=https://www.digikey.com/en/products/detail/stmicroelectronics/LDL1117S33R/7102071, lastupdated="05/03/2022 21:27:25", Lifecycle Status=Active, Minimum Order=1, Mounting Type="Surface Mount", Number of Regulators=1, Output Configuration=Positive, Output Type=Fixed, packaging=TapeAndReel, Part Number=LDL1117S33R, Part Status=Active, price=0.14, Protection Features="Over Current, Over Temperature, Under Voltage Lockout (UVLO)", PSRR="87dB ~ 65dB (120Hz ~ 100kHz)", series=-, Supplier 1=DigiKey
IC11: "IC INVERTER 6CH 6-INP 14TSSOP", Current - Output High, Low="24mA, 24mA", Current - Quiescent (Max)="1 µA", manufacturer="Texas Instruments", Operating Temperature="-40°C ~ 125°C", Package / Case="14-TSSOP (0.173\", 4.40mm Width)", Supplier Device Package=14-TSSOP, Supplier Part Number 1=296-1224-1-ND, Voltage - Supply="1.65V ~ 3.6V", componentlink1description=Datasheet, componentlink1url=http://www.ti.com/general/docs/suppproductinfo.tsp?distId=10&gotoUrl=http%3A%2F%2Fwww.ti.com%2Flit%2Fgpn%2Fsn74lvc14a, componentlink2description="DigiKey Link", componentlink2url=https://www.digikey.com/en/products/detail/texas-instruments/SN74LVC14APWR/276867, Features="Schmitt Trigger", lastupdated="05/03/2022 19:21:42", Lifecycle Status=Active, Logic Level - High="1.3V ~ 2V", Logic Level - Low="0.15V ~ 0.8V", Logic Type=Inverter, Max Propagation Delay @ V, Max CL="6.2ns @ 3.3V, 50pF", Minimum Order=1, Mounting Type="Surface Mount", Number of Circuits=6, Number of Inputs=6, packaging=TapeAndReel, Part Number=SN74LVC14APWR, Part Status=Active, partid=14, price=0.11, series=74LVC, Supplier 1=DigiKey
J1 J2: "TERM BLK 2P SIDE ENTRY 15MM PCB", Color=Black, Current="115 A", manufacturer=Molex, Supplier Part Number 1=WM20114-ND, Voltage="600 V", componentlink1description=Datasheet, componentlink1url=https://www.molex.com/pdm_docs/sd/399200302_sd.pdf, componentlink2description="DigiKey Link", componentlink2url=https://www.digikey.com/en/products/detail/molex/0399200302/3316297, lastupdated="05/03/2022 16:30:55", Lifecycle Status=Active, Mating Orientation="Horizontal with Board", Minimum Order=1, Mounting Type="Through Hole", Number of Levels=1, packaging=Bulk, Part Number=0399200302, Part Status=Active, Pitch="0.591\" (15.00mm)", Positions Per Level=2, price=5.90, series="Eurostyle 39920", Supplier 1=DigiKey, Wire Gauge="1-8 AWG", Wire Termination="Screw - Rising Cage Clamp"
J3: "CONN HEADER R/A 6POS 2.54MM", Insulation Color=Black, manufacturer=Molex, Material Flammability Rating="UL94 V-0", Operating Temperature="-40°C ~ 105°C", Supplier Part Number 1=23-0705550005-ND, Voltage Rating=250V, componentlink1description=Datasheet, componentlink1url=https://www.molex.com/pdm_docs/sd/705550001_sd.pdf, componentlink2description="DigiKey Link", componentlink2url=http://digikey.com/product-detail/en/molex/0705550005/23-0705550005-ND/1643402, Connector Type=Header, Contact Finish - Mating=Tin, Contact Finish - Post=Tin, Contact Finish Thickness - Mating="150.0µin (3.81µm)", Contact Length - Mating="0.240\" (6.10mm)", Contact Length - Post="0.130\" (3.30mm)", Contact Material="Phosphor Bronze", Contact Shape=Square, Contact Type="Male Pin", Fastening Type="Latch Holder", Features="Board Guide", Insulation Height="0.215\" (5.45mm)", Insulation Material="Polyester, Glass Filled", lastupdated="13/01/2020 00:04:40", Lifecycle Status=Active, Minimum Order=1, Mounting Type="Through Hole, Right Angle", Number of Positions=6, Number of Positions Loaded=All, Number of Rows=1, packaging=Tube, Part Number=0705550005, Part Status=Active, partid=102, Pitch - Mating="0.100\" (2.54mm)", price=1.19, series="SL 70555", Shrouding="Shrouded - 4 Wall", Style="Board to Cable/Wire", Supplier 1=DigiKey, Termination=Solder
J4: "CONN HEADER R/A 3POS 2.54MM", Insulation Color=Black, manufacturer=Molex, Material Flammability Rating="UL94 V-0", Operating Temperature="-40°C ~ 105°C", Supplier Part Number 1=WM4901-ND, Voltage Rating=250V, componentlink1description=Datasheet, componentlink1url=https://www.molex.com/pdm_docs/sd/705530002_sd.pdf, componentlink2description="DigiKey Link", componentlink2url=http://digikey.com/product-detail/en/molex/0705530002/WM4901-ND/114955, Connector Type=Header, Contact Finish - Mating=Gold, Contact Finish - Post=Tin, Contact Finish Thickness - Mating="15.0µin (0.38µm)", Contact Length - Mating="0.240\" (6.10mm)", Contact Length - Post="0.130\" (3.30mm)", Contact Material="Phosphor Bronze", Contact Shape=Square, Contact Type="Male Pin", Fastening Type="Latch Holder", Insulation Height="0.215\" (5.45mm)", Insulation Material="Polyester, Glass Filled", lastupdated="12/01/2020 23:55:56", Lifecycle Status=Active, Minimum Order=1, Mounting Type="Through Hole, Right Angle", Number of Positions=3, Number of Positions Loaded=All, Number of Rows=1, packaging=Tube, Part Number=0705530002, Part Status=Active, partid=86, Pitch - Mating="0.100\" (2.54mm)", price=1.02, series="SL 70553", Shrouding="Shrouded - 4 Wall", Style="Board to Cable/Wire", Supplier 1=DigiKey, Termination=Solder
R1 R2 R3 R4: library part ERJ-6GEYJ200V, "RES SMD 20 OHM 5% 1/8W 0805", Device Package="0805 (2012 Metric)", manufacturer="Panasonic Electronic Components", Operating Temperature="-55°C ~ 155°C", Power (Watts)="0.125W, 1/8W", Ratings=AEC-Q200, Supplier Device Package=0805, Supplier Part Number 1=P20ACT-ND, Temperature Coefficient=±200ppm/°C, Tolerance=±5%, componentlink1description=Datasheet, componentlink1url=http://industrial.panasonic.com/www-cgi/jvcr13pz.cgi?E+PZ+3+AOA0001+ERJ6GEYJ200V+7+WW, componentlink2description="DigiKey Link", componentlink2url=https://www.digikey.com/en/products/detail/panasonic-electronic-components/ERJ-6GEYJ200V/82980, Composition="Thick Film", Features="Automotive AEC-Q200", Height - Seated (Max)="0.028\" (0.70mm)", lastupdated="05/03/2022 17:15:03", Lifecycle Status=Active, Minimum Order=1, Number of Terminations=2, Package / Case="0805 (2012 Metric)", packaging=TapeAndReel, Part Number=ERJ-6GEYJ200V, Part Status=Active, partid=47698, price=0.01, Resistance="20 Ohms", series=ERJ-6G, Size / Dimension="0.079\" L x 0.049\" W (2.00mm x 1.25mm)", Supplier 1=DigiKey
R5 R6: library part CRCW060375K0FKEAC, "RES 75K OHM 1% 1/10W 0603", Device Package="0603 (1608 Metric)", manufacturer="Vishay Dale", Operating Temperature="-55°C ~ 155°C", Power (Watts)="0.1W, 1/10W", Supplier Device Package=0603, Supplier Part Number 1=541-5552-1-ND, Temperature Coefficient=±100ppm/°C, Tolerance=±1%, componentlink1description=Datasheet, componentlink1url=https://www.vishay.com/docs/28773/crcwce3.pdf, componentlink2description="DigiKey Link", componentlink2url=https://www.digikey.com/en/products/detail/vishay-dale/CRCW060375K0FKEAC/7924043, Composition="Thick Film", Height - Seated (Max)="0.022\" (0.55mm)", lastupdated="04/03/2022 17:45:17", Lifecycle Status=Active, Minimum Order=1, Number of Terminations=2, Package / Case="0603 (1608 Metric)", packaging=CutTape, Part Number=CRCW060375K0FKEAC, Part Status=Active, partid=65787, price=0.01, Resistance="75 kOhms", series=CRCW-C, Size / Dimension="0.063\" L x 0.031\" W (1.60mm x 0.80mm)", Supplier 1=DigiKey
R7: library part ERJ-P06J103V, "RES SMD 10K OHM 5% 1/2W 0805", Device Package="0805 (2012 Metric)", manufacturer="Panasonic Electronic Components", Operating Temperature="-55°C ~ 155°C", Power (Watts)="0.5W, 1/2W", Ratings=AEC-Q200, Supplier Device Package=0805, Supplier Part Number 1=P10KADCT-ND, Temperature Coefficient=±200ppm/°C, Tolerance=±5%, componentlink1description=Datasheet, componentlink1url=https://industrial.panasonic.com/cdbs/www-data/pdf/RDO0000/AOA0000C331.pdf, componentlink2description="DigiKey Link", componentlink2url=https://www.digikey.com/en/products/detail/panasonic-electronic-components/ERJ-P06J103V/525198, Composition="Thick Film", Features="Automotive AEC-Q200, Pulse Withstanding", Height - Seated (Max)="0.028\" (0.70mm)", lastupdated="04/03/2022 17:58:19", Lifecycle Status=Active, Minimum Order=1, Number of Terminations=2, Package / Case="0805 (2012 Metric)", packaging=TapeAndReel, Part Number=ERJ-P06J103V, Part Status=Active, partid=48720, price=0.02, Resistance="10 kOhms", series=ERJ-P06, Size / Dimension="0.079\" L x 0.049\" W (2.00mm x 1.25mm)", Supplier 1=DigiKey
R8 R9: library part ERJ-PA3J222V, "RES SMD 2.2K OHM 5% 1/4W 0603", Device Package="0603 (1608 Metric)", manufacturer="Panasonic Electronic Components", Operating Temperature="-55°C ~ 155°C", Power (Watts)="0.25W, 1/4W", Ratings=AEC-Q200, Supplier Device Package=0603, Supplier Part Number 1=P2.2KBZCT-ND, Temperature Coefficient=±200ppm/°C, Tolerance=±5%, componentlink1description=Datasheet, componentlink1url=https://industrial.panasonic.com/cdbs/www-data/pdf/RDO0000/AOA0000C331.pdf, componentlink2description="DigiKey Link", componentlink2url=https://www.digikey.com/en/products/detail/panasonic-electronic-components/ERJ-PA3J222V/5036018, Composition="Thick Film", Features="Automotive AEC-Q200, Pulse Withstanding", Height - Seated (Max)="0.022\" (0.55mm)", lastupdated="04/03/2022 17:46:44", Lifecycle Status=Active, Minimum Order=1, Number of Terminations=2, Package / Case="0603 (1608 Metric)", packaging=TapeAndReel, Part Number=ERJ-PA3J222V, Part Status=Active, partid=14127, price=0.01, Resistance="2.2 kOhms", series=ERJ-PA3, Size / Dimension="0.063\" L x 0.031\" W (1.60mm x 0.80mm)", Supplier 1=DigiKey
R10 R11 R12 R13: library part WSHP28182L000FEA, "RES 0.002 OHM 1% 10W 2818", Device Package=Nonstandard, manufacturer="Vishay Dale", Operating Temperature="-65°C ~ 170°C", Power (Watts)=10W, Ratings=AEC-Q200, Supplier Device Package=2818, Supplier Part Number 1=541-3273-1-ND, Temperature Coefficient=±200ppm/°C, Tolerance=±1%, componentlink1description=Datasheet, componentlink1url=http://www.vishay.com/docs/30347/wshp2818.pdf, componentlink2description="DigiKey Link", componentlink2url=http://digikey.com/product-detail/en/vishay-dale/WSHP28182L000FEA/541-3273-1-ND/6605249, Composition="Metal Element", Features="Automotive AEC-Q200, Current Sense, Moisture Resistant, Pulse Withstanding", Height - Seated (Max)="0.069\" (1.75mm)", lastupdated="04/03/2022 18:20:41", Lifecycle Status=Active, Minimum Order=1, Number of Terminations=2, Package / Case=Nonstandard, packaging=TapeAndReel, Part Number=WSHP28182L000FEA, Part Status=Active, partid=2683, price=0.90, Resistance="2 mOhms", series=WSHP2818, Size / Dimension="0.280\" L x 0.181\" W (7.10mm x 4.60mm)", Supplier 1=DigiKey
R14 R16 R17 R18 R19: library part ERJ-PA3J102V, "RES SMD 1K OHM 5% 1/4W 0603", Device Package="0603 (1608 Metric)", manufacturer="Panasonic Electronic Components", Operating Temperature="-55°C ~ 155°C", Power (Watts)="0.25W, 1/4W", Ratings=AEC-Q200, Supplier Device Package=0603, Supplier Part Number 1=P1KBZCT-ND, Temperature Coefficient=±200ppm/°C, Tolerance=±5%, componentlink1description=Datasheet, componentlink1url=https://industrial.panasonic.com/cdbs/www-data/pdf/RDO0000/AOA0000C331.pdf, componentlink2description="DigiKey Link", componentlink2url=https://www.digikey.com/en/products/detail/panasonic-electronic-components/ERJ-PA3J102V/5035970, Composition="Thick Film", Features="Automotive AEC-Q200, Pulse Withstanding", Height - Seated (Max)="0.022\" (0.55mm)", lastupdated="05/03/2022 17:04:10", Lifecycle Status=Active, Minimum Order=1, Number of Terminations=2, Package / Case="0603 (1608 Metric)", packaging=TapeAndReel, Part Number=ERJ-PA3J102V, Part Status=Active, partid=17507, price=0.01, Resistance="1 kOhms", series=ERJ-PA3, Size / Dimension="0.063\" L x 0.031\" W (1.60mm x 0.80mm)", Supplier 1=DigiKey
R15: library part ERJ-PA3J121V, "RES SMD 120 OHM 5% 1/4W 0603", Device Package="0603 (1608 Metric)", manufacturer="Panasonic Electronic Components", Operating Temperature="-55°C ~ 155°C", Power (Watts)="0.25W, 1/4W", Ratings=AEC-Q200, Supplier Device Package=0603, Supplier Part Number 1=P120BZCT-ND, Temperature Coefficient=±200ppm/°C, Tolerance=±5%, componentlink1description=Datasheet, componentlink1url=https://industrial.panasonic.com/cdbs/www-data/pdf/RDO0000/AOA0000C331.pdf, componentlink2description="DigiKey Link", componentlink2url=https://www.digikey.com/en/products/detail/panasonic-electronic-components/ERJ-PA3J121V/5035980, Composition="Thick Film", Features="Automotive AEC-Q200, Pulse Withstanding", Height - Seated (Max)="0.022\" (0.55mm)", lastupdated="05/03/2022 17:04:36", Lifecycle Status=Active, Minimum Order=1, Number of Terminations=2, Package / Case="0603 (1608 Metric)", packaging=TapeAndReel, Part Number=ERJ-PA3J121V, Part Status=Active, partid=8933, price=0.01, Resistance="120 Ohms", series=ERJ-PA3, Size / Dimension="0.063\" L x 0.031\" W (1.60mm x 0.80mm)", Supplier 1=DigiKey
S1: "SWITCH SLIDE SPDT 300MA 30V", Current Rating (Amps)="300mA (DC)", manufacturer=C&K, Supplier Part Number 1=CKN10393-ND, Voltage Rating - DC=30V, Actuator Length=7.00mm, Actuator Type=Standard, Circuit=SPDT, componentlink1description=Datasheet, componentlink1url=//media.digikey.com/pdf/Data%20Sheets/C&K/SK-12F17-G.pdf, componentlink2description="DigiKey Link", componentlink2url=http://digikey.com/product-detail/en/c-k/SK-12F17-G-7/CKN10393-ND/2747163, Contact Finish=Silver, Contact Material=Copper, Contact Timing="Not Specified", lastupdated="22/01/2022 09:16:27", Lifecycle Status=Active, Minimum Order=1, Mounting Type="Through Hole, Right Angle", packaging=Bulk, Part Number="SK-12F17-G 7", Part Status=Active, partid=3, price=0.55, series="SK, COMAX", Supplier 1=DigiKey, Switch Function=On-On, Termination Style="PC Pin"
S2 S3: "SWITCH TACTILE SPST-NO 0.05A 24V", Contact Rating @ Voltage="0.05A @ 24VDC", manufacturer="TE Connectivity ALCOSWITCH Switches", Operating Force=260gf, Operating Temperature="-40°C ~ 105°C", Supplier Part Number 1=450-2138-1-ND, Actuator Height off PCB, Vertical=7.00mm, Actuator Orientation="Top Actuated", Actuator Type=Standard, Circuit=SPST-NO, componentlink1description=Datasheet, componentlink1url=https://www.te.com/commerce/DocumentDelivery/DDEController?Action=srchrtrv&DocNm=1308111-1_SWITCHES_CORE_PROGRAM_CATALOG&DocType=CS&DocLang=English, componentlink2description="DigiKey Link", componentlink2url=https://www.digikey.com/en/products/detail/te-connectivity-alcoswitch-switches/FSM6JSMAASTR/5343804, Illumination=Non-Illuminated, lastupdated="05/03/2022 17:37:10", Lifecycle Status=Active, Minimum Order=1, Mounting Type="Surface Mount", Outline="6.00mm x 6.00mm", packaging=TapeAndReel, Part Number=FSM6JSMAASTR, Part Status=Active, price=0.30, series=FSMJSMA, Supplier 1=DigiKey, Switch Function=Off-Mom, Termination Style="Gull Wing"

## Free pads (board coordinates)
  round 11 hole 6.4: A(95,63.5) B(45,63.5)
  round 7 hole 3.2: M(143,98) M1(7,98) M2(7,7) M3(143,7)

## Via types
v1: diameter 1.4, hole 0.8, Top Layer to Bottom Layer, tented both sides, 420 vias
v2: diameter 0.8, hole 0.4, Top Layer to Bottom Layer, tented both sides, 44 vias
v3: diameter 1.6, hole 1, Top Layer to Bottom Layer, tented both sides, 4 vias
v4: diameter 3.45, hole 3.45, Top Layer to Bottom Layer, tented both sides, 2 vias

## Nets (pads, with @x,y where several pads share a name; then routed paths per layer and width w, separated by ;. In a path a pad name is that pad's centre, name@x,y a point inside that pad or via, vN(x,y) a via of type N, cw(c..) or ccw(c..) an arc to the next point about the centre after c; other vN are vias at no path point)
3V3: C11.2 C12.2 C13.2 IC10.2 IC10.4 IC11.14 R16.2 R17.2 R18.2 R19.2 S1.3 TP17.1 | length 83.2
  Top Layer w0.25: C11.2 116.8,91.575 119.625,94.4 136.61,94.4 140.1,90.91 140.1,90.9 140.65,90.35 140.65,87.726 140.8,87.576 140.8,86.996 140.847,86.95 143.225,86.95 C13.2 ; R18.2 122.85,75.45 123.4,74.9 123.4,74.89 123.59,74.7 130.91,74.7 131.1,74.89 131.1,74.9 131.65,75.45 R19.2 140.25,75.5 144.25,71.5 S1.3
  Top Layer w0.5: IC10.2 117,84 ; C11.2 116.8,86.125 117,85.925 117,84 ; R18.2 121.675,75.5 119.15,78.025 IC10.4 117,84
  other v2: 119,88
12V: C1.2 C2.2 C3.2 C4.2 C8.1 C9.1 C10.2 D5.1 D6.1 D7.2 D8.2 IC1.15 IC1.16 IC2.D IC3.D IC4.D IC5.D IC10.3 J2.1 TP16.1 | length 76.9
  Top Layer w1: 110,72.5 110,61 111.5,59.5 D5.1@114,59.5 ; 111.575,80.425 112.35,81.2 112.35,81.45 112.6,81.7 IC10.3 ; D6.1 114,47.925 114,59.075 D5.1
  Top Layer w2: 105,82.5 105.5,82 ; 111.575,80.425 110,78.85 110,72.5 110.5,72 129,72 135.05,65.95 C4.2
  other v1: 15,55 20,55 25,55 30,55 15,60 25,60 30,60 15,65 25,65 30,65 17.5,70 27.5,70 15,75 30,75 35,79.5 37.5,79.5 40,79.5 42.5,79.5 67.5,79.5 70,79.5 72.5,79.5 17.5,80 27.5,80 75.098,80.103 35,82 37.5,82 40,82 42.5,82 45,82 47.5,82 50,82 52.5,82 57.5,82 60,82 62.5,82 67.5,82 70,82 72.5,82 75,82 77.5,83 80,83 82.5,83 85,83 87.5,83 90,83 92.5,83 95,83 97.5,83 100,83 15,85 30,85 40,85 42.5,85 45,85 47.5,85 50,85 52.5,85 55,85 57.5,85 60,85 62.5,85 72.5,85 75,85 77.5,85 80,85 82.5,85 85,85 87.5,85 90,85 92.5,85 95,85 97.5,85 100,85 17.5,90 27.5,90 30,95 27.5,100 15,102.5 30,102.5
BST_A: C6.2 D6.2 IC1.10 | length 5.2
  Top Layer w0.5: C6.2 116.8,45.55 117.2,45.95 117.25,45.95 117.575,46.275 D6.2 118.5,47.5 118.785,47.785 IC1.10
BST_B: C5.2 D5.2 IC1.1 | length 5.2
  Top Layer w0.5: C5.2 116.8,61.45 117.2,61.05 117.25,61.05 117.575,60.725 D5.2 118.5,59.5 118.785,59.215 IC1.1
EN: IC1.3 J3.1 R14.2 TP3.1 | length 77.4
  Top Layer w0.25: IC1.3 121.676,56.675 121.851,56.5 v2(125.5,56.5) ; v2(142,66) R14.2
  Layer 2 w0.25: J3.1@121.15,91.777 123.373,94 135.5,94 142,87.5 v2(142,66) 142,58.5 140,56.5 v2(125.5,56.5)
GATEH_A: D1.1 IC4.G IC5.G R1.2 TP4.1 | length 80.7
  Top Layer w0.5: IC4.G 78.992,77.482 79.982,77.482 v2(80,77.5) ; IC5.G 95.492,77.482 96.482,77.482 v2(96.5,77.5) ; v3(125,37.5) R1.2 127.4,39.125 128,39.725 D1.1
  Layer 2 w2.5: v2(80,77.5) 80.3,77.8 95.7,77.8 96,77.5 v2(96.5,77.5) 96.75,77.75 104.25,77.75 111.75,70.25 111.75,51.75 125,38.5 v3(125,37.5)
GATEH_B: D2.1 IC2.G IC3.G R2.2 TP7.1 | length 102.4
  Top Layer w0.5: IC2.G 45.992,77.482 46.982,77.482 v2(47,77.5) ; IC3.G 63.993,77.482 64.982,77.482 v2(65,77.5) ; v3(125,70) R2.2 127.4,67.875 128,67.275 D2.1
  Layer 2 w2.5: v2(47,77.5) 49,79.5 65,79.5 ; v2(65,77.5) 65,79.5 ; v3(125,70) 106,89 71,89 65,83 65,79.5
GATEL_A: D3.1 IC7.G IC9.G R3.2 TP6.1 | length 55.7
  Top Layer w0.5: IC7.G 78.492,43.483 79.483,43.483 v2(79.5,43.5) ; IC9.G 95.492,43.483 96.483,43.483 v2(96.5,43.5) ; v3(122,37.5) D3.1 ; D3.1 122,40.4 122.6,41 122.775,41 124.9,43.125 R3.2
  Layer 2 w2.5: v2(79.5,43.5) 80.5,44.5 95.227,44.5 96.227,43.5 v2(96.5,43.5) 97.5,44.5 111,44.5 118,37.5 v3(122,37.5)
GATEL_B: D4.1 IC6.G IC8.G R4.2 TP11.1 | length 117
  Top Layer w0.5: IC8.G 47.475,43.58 47.525,43.63 47.64,43.63 47.953,43.943 48.443,43.943 v2(48.5,44) ; IC6.G 64.069,43.5 64.5,43.931 v2(64.5,44) ; v3(119.5,67.5) 121.5,67.5 D4.1 122,66.6 122.6,66 122.775,66 124.9,63.875 R4.2
  Layer 2 w2.5: v2(48.5,44) 49.5,45 63.5,45 v2(64.5,44) 65.5,45 68.536,45 70,46.464 70,71.5 79,80.5 106.5,80.5 v3(119.5,67.5)
GND: C1.1 C2.1 C3.1 C4.1 C8.2 C9.2 C10.1 C11.1 C12.1 C13.1 C14.1 C15.1 D13.2 IC1.4 IC10.1 IC11.7 J2.2 J3.6 J4.2 pad.M pad.M1 pad.M2 pad.M3 R5.1 R6.1 R10.2 R11.1 R12.2 R13.1 S1.1 S2.1 S2.2 S3.1 S3.2 TP18.1 | length 322.3
  Top Layer w0.25: S3.2 133.25,81.75 134.55,83.05 IC11.7 ; C13.1 145.675,85.325 148.25,82.75 D13.2 148.25,77.4 147.175,76.325 147.175,74.951 148.45,73.676 148.45,67.95 S1.1
  Top Layer w0.3: IC11.7 138.813,83.05 139.438,82.425 142.425,82.425 v2(143.5,83.5) C13.1
  Top Layer w0.5: 87.5,19.5 89,18 91.5,18 93,18 97,18 101,18 v1@102.5,18 ; 102.5,8 109.5,8 112,10.5 112,32.5 ; IC10.1 113.1,86.3 115.2,88.4 C12.1 C11.1 v2@115.2,92.219 ; R6.1 R5.1 115.5,51.15 115.5,54.5 116.405,55.405 IC1.4 123.595,55.405 125,54 125,49 v2(124.5,48.5) 122,46 120,46 112,38 112,32.5 ; v2(116.734,75.65) 116.734,75.62 117.532,74.822 117.532,74.468 118.3,73.7 130.497,73.7 139.697,64.5 144.594,64.5 145.594,65.5 S1.1 146,58.5 144,56.5 C4.1 137.95,56.25 137.55,55.85 137.475,55.85 136.175,54.55 C2.1 C1.1 136.175,52.45 137.475,51.15 137.55,51.15 137.95,50.75 C3.1 137.95,35.45 135,32.5 112,32.5 ; v2@116.8,75.65 116.8,77.35 C10.1 ; S2.2 123.5,86.3 123.5,81.7 S2.1@121.275,79.475 ; C14.1 122.825,77.05 121.638,78.237 121.638,79.062 S2.1 S2.1@121.275,79.475 ; v2(123,79.5) 122.975,79.475 S2.1@121.275,79.475 ; C15.1 131.675,77.05 132.862,78.237 132.862,79.062 S3.2 133.275,79.475 134.975,79.475 v2(135,79.5) ; S3.1 133.25,90.844 133.85,91.444 J3.6@133.85,91.777
  Bottom Layer w0.5: v2(115,92.5) 117.5,90 117.5,77.5 116.791,76.791 116.791,75.707 v2(116.734,75.65) ; v2(123,79.5) v2(135,79.5) 135,90.528 133.85,91.678 133.85,91.777 138.829,96.756 141.756,96.756 pad.M
  other v1: 35,4 40,4 45,4 50,4 55,4 60,4 65,4 70,4 75,4 80,4 85,4 90,4 95,4 100,4 105,4 32.5,6.5 37.5,6.5 42.5,6.5 47.5,6.5 52.5,6.5 57.5,6.5 62.5,6.5 67.5,6.5 72.5,6.5 77.5,6.5 82.5,6.5 87.5,6.5 92.5,6.5 97.5,6.5 102.5,6.5 43,14 97,14.25 17.5,15 39,16.5 47,16.5 93,16.5 101,16.5 60,17.5 80,17.5 32.5,18.5 35,18.5 37.5,18.5 39,18.5 47,18.5 48.5,18.5 91.5,18.5 93,18.5 101,18.5 102.5,18.5 4.5,20 15,20 56,20 64,20 76,20 84,20 54.5,22 56,22 64,22 65.5,22 67.5,22 70,22 72.5,22 74,22 76,22 84,22 86,22 2,25 17.5,25 27.5,25 4.5,30 15,30 30,30 2,35 17.5,35 27.5,35 4.5,40 15,40 25,40 30,40 2,45 15,45 25,45 30,45 137.75,47.75 2,50 15,50 25,50 30,50 137.75,53.5 137.75,59.25
  other v2: 108.5,40.5 108.5,46.5 124.5,51 124.5,53.5 116.5,54 116.5,56 108.5,58 132.85,60.5 132.85,64 119.5,65.4 108.5,65.5 113.6,65.5 143.5,81.5 112.5,88.6 112.5,93.5
HIGHIN_A: C14.2 IC1.7 IC11.1 J3.2 R18.1 S2.3 S2.4 TP5.1 | length 68.3
  Top Layer w0.25: S2.4 125.75,88.9 127.33,90.48 127.33,92.27 128.477,93.417 133.643,93.417 135.2,91.86 135.2,86.996 135.247,86.95 IC11.1
  Top Layer w0.5: v2(118.5,52) 118.581,52 118.967,51.614 120.281,51.614 IC1.7 ; J3.2@123.69,91.777 123.44,91.527 123.44,89.56 124.45,88.55 S2.4 125.75,79.1 124.375,77.725 124.375,77.225 124.15,77 124.162,76.988 124.162,75.512 R18.1 v2(125.5,75.5)
  Layer 2 w0.5: v2(118.5,52) 118.5,56.5 126.8,64.8 126.8,74.2 v2(125.5,75.5)
HIGHIN_B: C15.2 IC1.2 IC11.3 J3.4 R19.1 S3.3 S3.4 TP10.1 | length 53.9
  Top Layer w0.25: J3.4@128.77,91.777 128.77,92.027 129.71,92.967 131.553,92.967 132.25,92.27 132.25,89.933 132.225,89.908 132.225,87.57 134.145,85.65 IC11.3
  Top Layer w0.5: IC1.2 120.319,57.964 121.964,57.964 v2(122,58) ; J3.4@128.77,91.777 128.635,91.642 128.635,88.665 S3.3 128.75,79.1 130.125,77.725 130.125,77.225 130.35,77 130.337,76.988 130.337,75.512 R19.1 v2(129,75.5)
  Layer 2 w0.5: v2(122,58) 122,59 127.5,64.5 127.5,74 v2(129,75.5)
HIGHOUT_A: D1.2 IC1.11 R1.1 | length 9.8
  Top Layer w0.5: R1.1 125.325,41.2 125.6,41.2 128,43.6 D1.2 128,47.473 128.293,47.766 129.681,47.766 IC1.11
HIGHOUT_B: D2.2 IC1.20 R2.1 | length 9.8
  Top Layer w0.5: R2.1 125.1,66.125 127.225,64 127.4,64 128,63.4 D2.2 128,59.527 128.293,59.234 129.681,59.234 IC1.20
HIGHSRC_A: C6.1 D7.1 D9.2 D11.2 IC1.12 IC4.S IC5.S IC7.D IC9.D J1.2 pad.A R7.1 R9.1 TP1.1 TP9.1 | length 28.6
  Top Layer w0.5: v1(105,55) 105.244,55 105.744,55.5 ; 105.744,45.5 v2(113,45.5) C6.1 ; v2(127,48) 128.055,49.055 IC1.12
  Layer 1 w0.5: v2(113,45.5) 124.5,45.5 v2(127,48)